# Altium PCB GOCARTPCB.PcbDoc
Units mm, origin at the board's own origin, x right, y up, seen from the top; angles counter-clockwise.
Board outline 152.4 x 101.6 mm, 2 copper layers (Top Layer, Bottom Layer); 35 components, 33 nets, 112 pads, 0 vias.
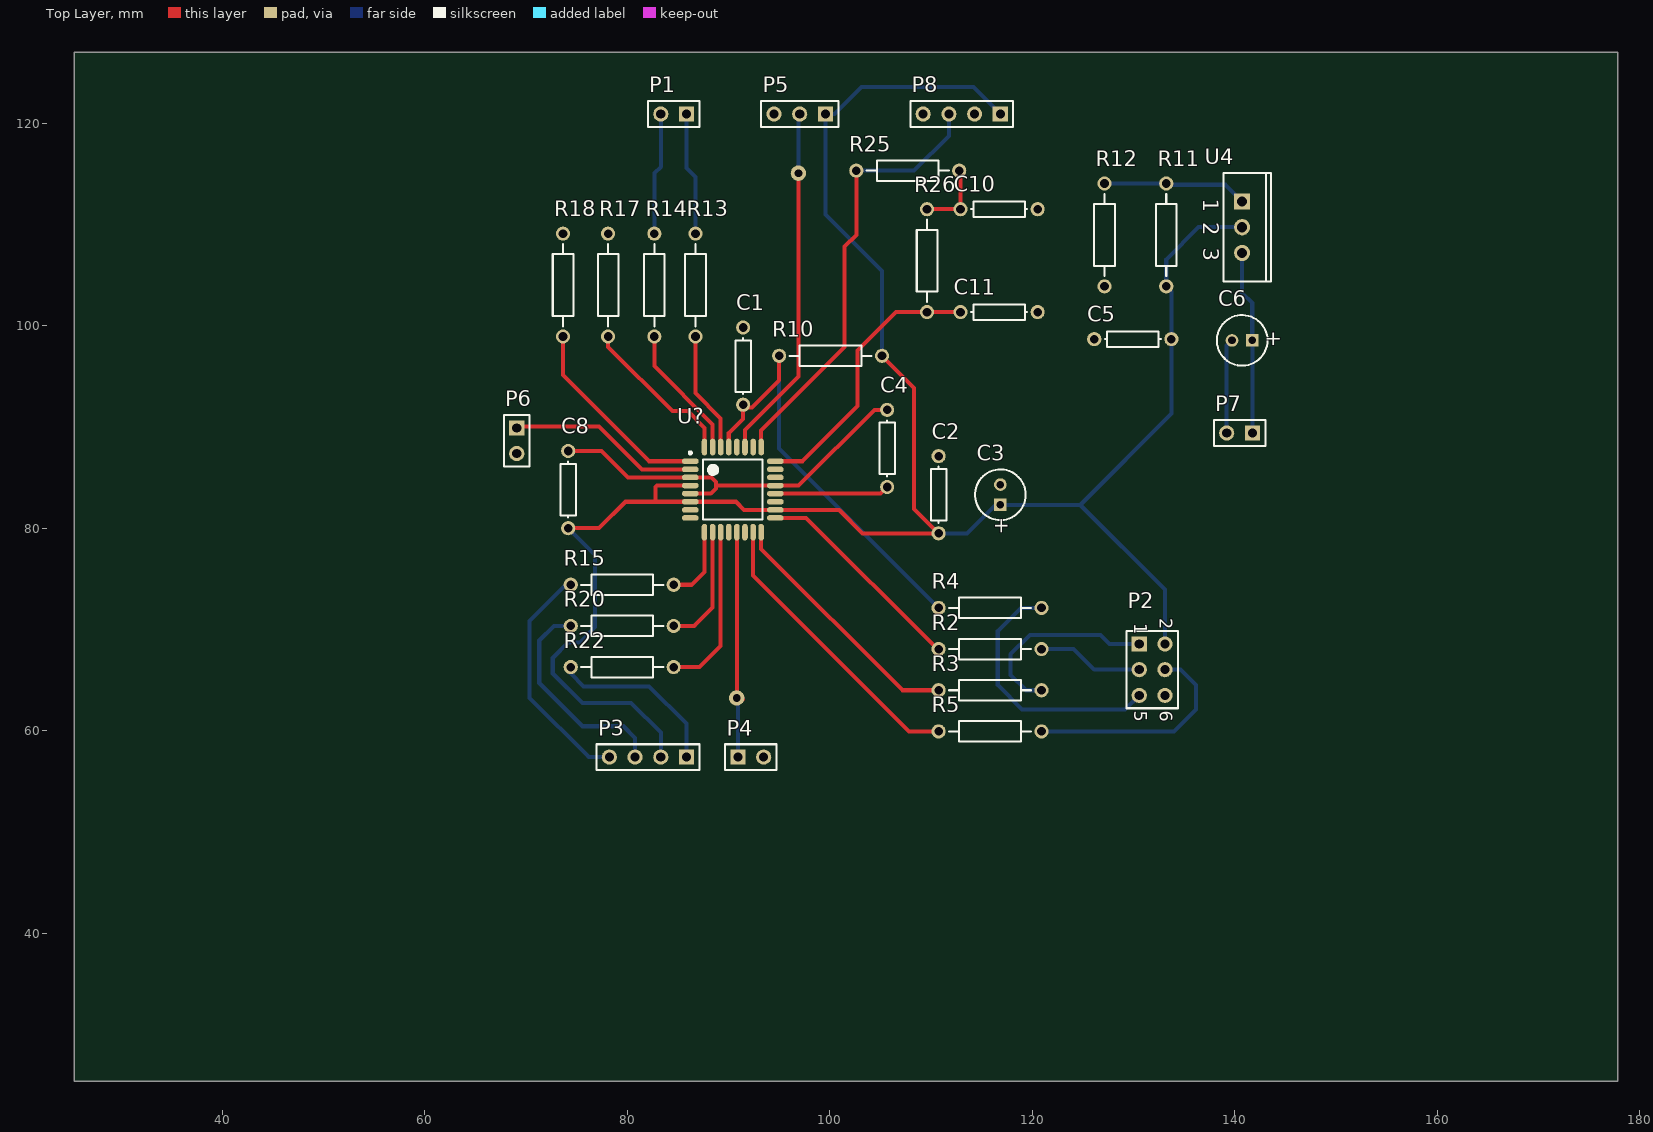
[diagram p0: Top Layer view]
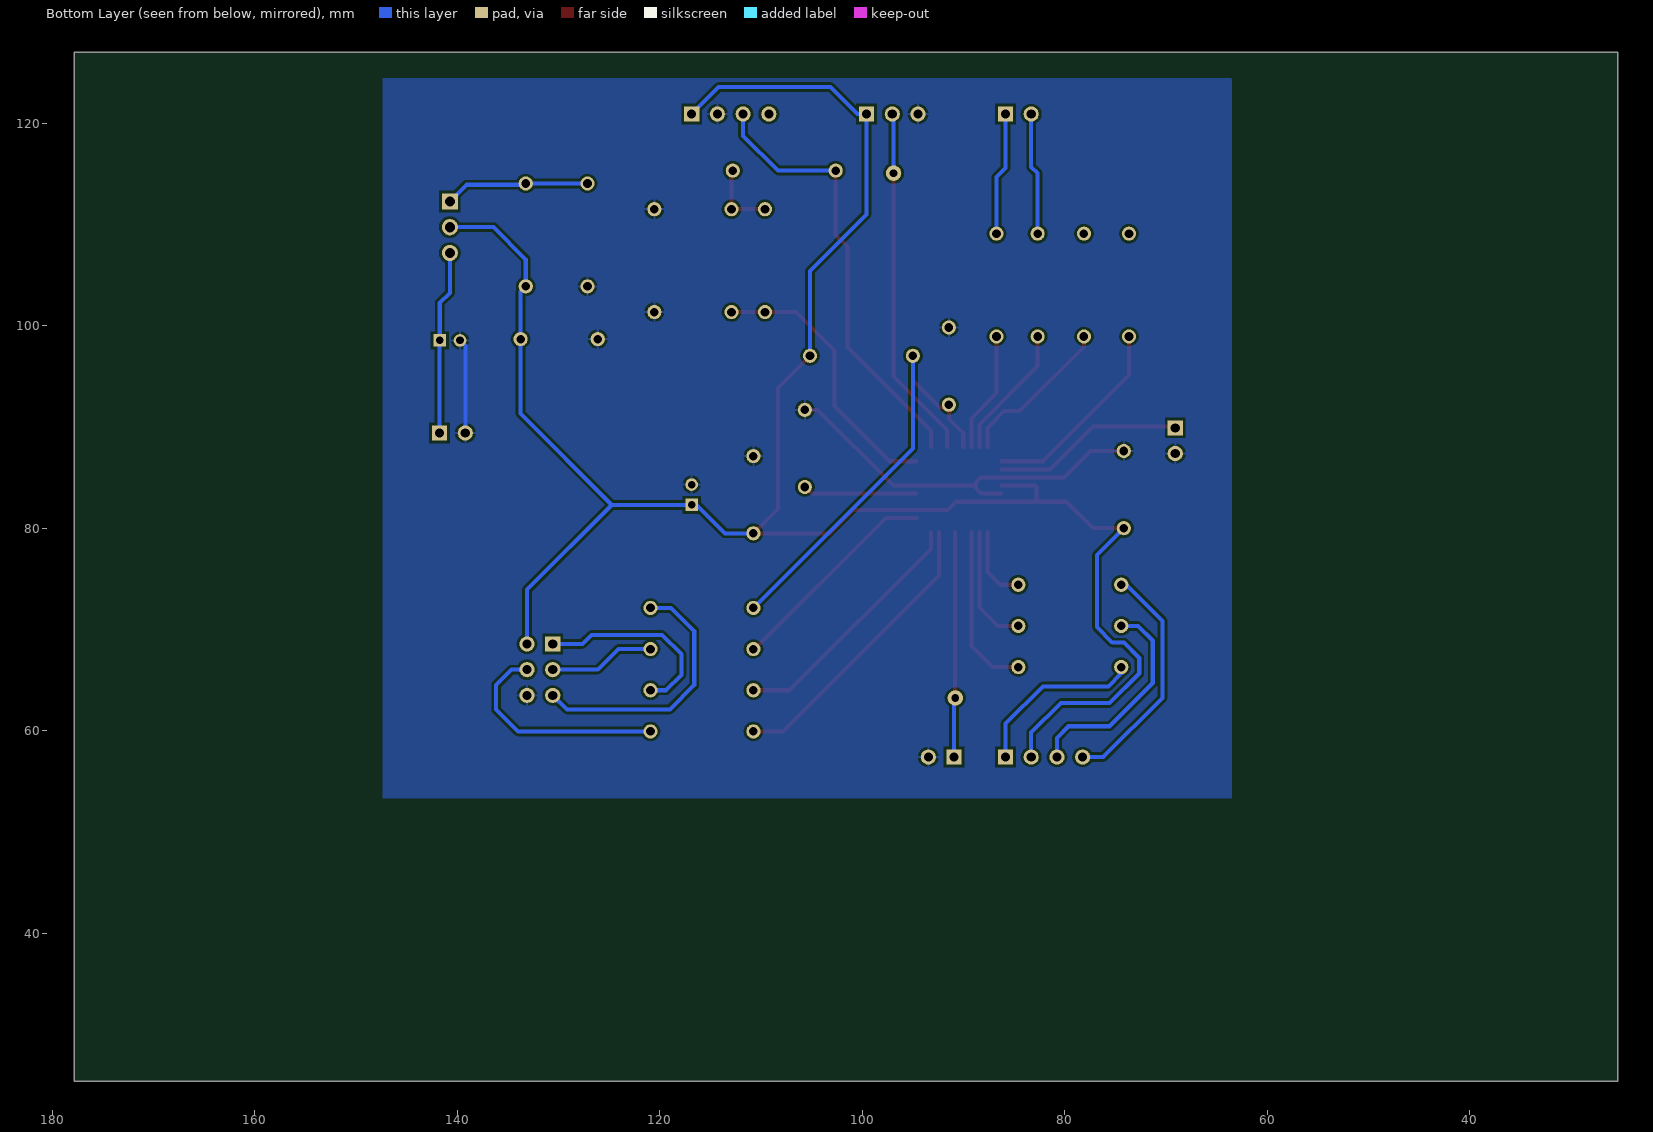
[diagram p1: Bottom Layer view, seen from below]

## Layer stack, top to bottom
Top Layer: signal copper 0.0356
Dielectric: dielectric 0.32, FR-4, Dk 4.8
Bottom Layer: signal copper 0.0356

## Board outline
25.4,25.4 177.8,25.4 177.8,127 25.4,127

## Design rules (kind name [scope] priority, off if disabled: settings)
Clearance [All] p1: gap=0.25
ComponentClearance [All] p1: gap=0.254 collisioncheckmode=3 verticalgap=0.254
PolygonConnect [All] p1: connectstyle=Relief reliefconductorwidth=0.254 reliefentries=4 polygonreliefangle="90 Angle"
RoutingVias [All] p1: holewidth=0.711 width=1.27 viastyle="Through Hole" minholewidth=0.711 minwidth=1.27 maxholewidth=0.711 maxwidth=1.27
SolderMaskExpansion [All] p1: expansion=0.102
TestPointUsage [All] p1: valid=0 allowmultiple=FALSE
Testpoint [All] p1: side=15 testpointundercomponent=TRUE minsize=1.016 maxsize=2.54 preferedsize=1.524 minholesize=0 maxholesize=1.016 preferedholesize=0.813 testpointgrid=0.025 style=1023 order=0123456789
Width [All] p1: maxlimit=1 minlimit=0.4 preferedwidth=0.4
18 further rules are at their usual default settings.

## Components (designator, comment, footprint, x,y, rotation, side; value= is the part's Value field where it differs from the comment)
C1 "" AXIAL-0.3 91.44,96.012 r90 top
C2 "" AXIAL-0.3 110.744,83.312 r90 top
C3 "" B 116.84,83.312 r90 top
C4 "" AXIAL-0.3 105.664,87.884 r270 top
C5 "" AXIAL-0.3 129.921,98.679 r180 top
C6 "" B 140.716,98.552 r180 top
C8 "" AXIAL-0.3 74.168,83.82 r90 top
C10 "" AXIAL-0.3 116.713,111.506 r0 top
C11 "" AXIAL-0.3 116.713,101.346 r0 top
P1 "Header 2" HDR1X2 85.852,120.904 r180 top
P2 "Header 3X2" HDR2X3 130.556,68.58 r270 top
P3 "RGBLED" HDR1X4 85.852,57.404 r180 top
P4 "Header 2" HDR1X2 90.932,57.404 r0 top
P5 "Header 3" HDR1X3 99.568,120.904 r180 top
P6 "Header 2" HDR1X2 69.088,89.916 r270 top
P7 "Header 2" HDR1X2 141.732,89.408 r180 top
P8 "RGBLED" HDR1X4 116.84,120.904 r180 top
R2 "Res3" AXIAL-0.4 115.824,68.072 r0 top
R3 "Res3" AXIAL-0.4 115.824,64.008 r0 top
R4 "Res3" AXIAL-0.4 115.824,72.136 r0 top
R5 "Res3" AXIAL-0.4 115.824,59.944 r180 top
R10 "Res3" AXIAL-0.4 100.076,97.028 r180 top
R11 "Res3" AXIAL-0.4 133.223,108.966 r270 top
R12 "Res3" AXIAL-0.4 127.127,108.966 r90 top
R13 "" AXIAL-0.4 86.741,104.013 r270 top
R14 "" AXIAL-0.4 82.677,104.013 r270 top
R15 "Res3" AXIAL-0.4 79.502,74.422 r180 top
R17 "" AXIAL-0.4 78.105,104.013 r270 top
R18 "" AXIAL-0.4 73.66,104.013 r270 top
R20 "Res3" AXIAL-0.4 79.502,70.358 r180 top
R22 "Res3" AXIAL-0.4 79.502,66.294 r180 top
R25 "Res3" AXIAL-0.4 107.696,115.316 r0 top
R26 "Res3" AXIAL-0.4 109.601,106.426 r270 top
U4 "LM317KC" KC03 140.716,109.728 r270 top
U? "ATmega8-16AC" 32A_N 90.424,83.82 r0 top

## Footprints (in the part's own frame and the unit in brackets; to place one, negate y for a bottom-side part, rotate by r counter-clockwise, add the part's x,y. Pads: shape width x height; smd on the part's side, far side on the other; paste and mask are expansions set on the pad)
32A_N [mm] "Thin QFP, 32-Leads, Body 7x7mm, Pitch 0.8mm, IPC Medium Density"
  oval 1.65x0.55 smd: 1(-4.2,2.8) 2(-4.2,2) 3(-4.2,1.2) 4(-4.2,0.4) 5(-4.2,-0.4) 6(-4.2,-1.2) 7(-4.2,-2) 8(-4.2,-2.8) 17(4.2,-2.8) 18(4.2,-2) 19(4.2,-1.2) 20(4.2,-0.4) 21(4.2,0.4) 22(4.2,1.2) 23(4.2,2) 24(4.2,2.8)
  oval 0.55x1.65 smd: 9(-2.8,-4.2) 10(-2,-4.2) 11(-1.2,-4.2) 12(-0.4,-4.2) 13(0.4,-4.2) 14(1.2,-4.2) 15(2,-4.2) 16(2.8,-4.2) 25(2.8,4.2) 26(2,4.2) 27(1.2,4.2) 28(0.4,4.2) 29(-0.4,4.2) 30(-1.2,4.2) 31(-2,4.2) 32(-2.8,4.2)
  silkscreen extent -4.32,-2.95 2.95,3.75, body extent -3.5,-3.5 3.5,3.5, height 1.2
AXIAL-0.3 [mm] "Resistor; 2 Leads"
  round 1.4 hole 0.85: 1(-3.81,0) 2(3.81,0)
  silkscreen extent -2.77,-0.76 2.77,0.76
AXIAL-0.4 [mm] "Resistor; 2 Leads"
  round 1.4 hole 0.85: 1(-5.08,0) 2(5.08,0)
  silkscreen extent -4.06,-1.02 4.06,1.02
B [mm] "Capacitor, Electrolytic, Radial; Body 5 x 6.8 mm (Dia.xH typ); Pin Spacing 2 mm (typ)"
  rect 1.25x1.25 hole 0.75: 1(-1,0)
  round 1.25 hole 0.75: 2(1,0)
  silkscreen extent -2.5,-2.5 2.5,2.5
HDR1X2 [mm] "Connector; Header; 2 Position"
  rect 1.5x1.5 hole 0.9: 1(0,0)
  round 1.5 hole 0.9: 2(2.54,0)
  silkscreen extent -1.27,-1.27 3.81,1.27
HDR1X3 [mm] "Connector; Header; 3 Position"
  rect 1.5x1.5 hole 0.9: 1(0,0)
  round 1.5 hole 0.9: 2(2.54,0) 3(5.08,0)
  silkscreen extent -1.27,-1.27 6.35,1.27
HDR1X4 [mm] "Connector; Header; 4 Position"
  rect 1.5x1.5 hole 0.9: 1(0,0)
  round 1.5 hole 0.9: 2(2.54,0) 3(5.08,0) 4(7.62,0)
  silkscreen extent -1.27,-1.27 8.89,1.27
HDR2X3 [mm] "Connector; Header; 3x2 Position"
  rect 1.5x1.5 hole 0.9: 1(0,0)
  round 1.5 hole 0.9: 2(0,2.54) 3(2.54,0) 4(2.54,2.54) 5(5.08,0) 6(5.08,2.54)
  silkscreen extent -1.27,-1.27 6.35,3.81
KC03 [mm] "TO, Thru-Hole, Vertical, Heatsink Mounted; 3 In-Line Leads; Pitch 2.54 mm"
  rect 1.6x1.6 hole 1: 1(-2.54,0)
  round 1.6 hole 1: 2(0,0) 3(2.54,0)
  silkscreen extent -5.35,-1.85 5.35,2.85

## Part data
C1 C2 C4 C5 C8 C10 C11: library part Cap, "Capacitor"
C3 C6: library part "Cap Pol1", "Polarized Capacitor (Radial)"
P1 P4 P6 P7: "Header, 2-Pin"
P2: "Header, 3-Pin, Dual row"
P3 P8: library part "Header 4", "Header, 4-Pin"
P5: "Header, 3-Pin"
R2 R3 R4 R5 R10 R11 R12 R15 R20 R22 R25 R26: "Resistor"
R13 R14 R17 R18: library part Res3, "Resistor"
U4: "3-Terminal Adjustable Regulator"
U?: "8-Bit AVR Microcontroller with 8K Bytes of In-System Programmable Flash Memory"

## Free pads (board coordinates)
  round 1.524 hole 0.762: 1(90.805,63.246) 2(96.901,115.062)

## Nets (pads, with @x,y where several pads share a name; then routed paths per layer and width w, separated by ;. In a path a pad name is that pad's centre, name@x,y a point inside that pad or via, vN(x,y) a via of type N, cw(c..) or ccw(c..) an arc to the next point about the centre after c; other vN are vias at no path point)
"ACCEL INPUT": P5.2 pad.2 U?.27 | length 34.9
  Top Layer w0.4: U?.27 91.624,89.719 96.901,94.996 pad.2
  Bottom Layer w0.4: pad.2 P5.2@96.901,120.777
BRAKE: R17.1
"CURRENT SENSE": C11.1 R26.2 U?.24 | length 27.6
  Top Layer w0.4: U?.24 97.288,86.62 102.743,92.075 102.743,97.536 106.553,101.346 C11.1
GND: C1.2 C2.2 C3.2 C4.1 C5.2 C6.2 C8.2 C10.2 C11.2 P2.6 P4.2 P5.3 P6.2 P7.2 P8.2 R12.1 U?.3 U?.5 U?.21 | length 48.5
  Top Layer w0.4: C8.2 77.47,87.63 80.08,85.02 U?.3@86.174,85.02 ; U?.5 88.246,83.42 88.773,83.947 88.773,84.582 88.335,85.02 U?.3 ; 88.792,84.22 96.92,84.22 104.394,91.694 C4.1
  Bottom Layer w0.4: P7.2 139.192,98.028 C6.2
MISO: R3.1 U?.16 | length 24.9
  Top Layer w0.4: U?.16@93.224,79.57 93.224,77.972 107.188,64.008 R3.1
MOSI: R5.2 U?.15 | length 29
  Top Layer w0.4: U?.15 92.424,75.343 107.823,59.944 R5.2
NetC4_2: C4.2 U?.20 | length 11.3
  Top Layer w0.4: U?.20 105.01,83.42 C4.2
NetC10_1: C10.1 R25.2 R26.1 | length 7.2
  Top Layer w0.4: R26.1 C10.1 112.903,115.189 R25.2
NetP2_1: P2.1 R3.2 | length 19.6
  Bottom Layer w0.4: R3.2 119.38,64.008 117.856,65.532 117.856,67.564 119.761,69.469 126.746,69.469 127.635,68.58 P2.1
NetP2_3: P2.3 R2.2 | length 10.5
  Bottom Layer w0.4: R2.2 124.079,68.072 126.111,66.04 P2.3
NetP2_4: P2.4 R5.1 | length 22.2
  Bottom Layer w0.4: R5.1 133.985,59.944 136.144,62.103 136.144,64.516 134.62,66.04 P2.4
NetP2_5: P2.5 R4.2 | length 26.1
  Bottom Layer w0.4: R4.2 118.872,72.136 116.586,69.85 116.586,64.516 118.999,62.103 129.159,62.103 P2.5
NetP3_1: P3.1 R22.2 | length 17.4
  Bottom Layer w0.4: R22.2 74.422,65.659 75.692,64.389 82.169,64.389 85.852,60.706 P3.1
NetP3_3: P3.3 R20.2 | length 21.5
  Bottom Layer w0.4: R20.2 72.771,70.358 71.31,68.897 71.31,64.706 75.565,60.452 79.629,60.452 80.772,59.309 P3.3
NetP3_4: P3.4 R15.2 | length 23.5
  Bottom Layer w0.4: R15.2 73.914,74.422 70.358,70.866 70.358,63.246 76.2,57.404 P3.4
NetR11_1: R11.1 R12.2 U4.1 | length 14.3
  Bottom Layer w0.4: R12.2 R11.1 133.35,113.919 139.065,113.919 U4.1
NetR13_2: R13.2 U?.30 | length 11.9
  Top Layer w0.4: R13.2 86.741,93.345 89.224,90.862 U?.30
NetR14_2: R14.2 U?.31 | length 13.3
  Top Layer w0.4: R14.2 82.677,96.012 88.424,90.265 U?.31
NetR15_1: R15.1 U?.9 | length 7.5
  Top Layer w0.4: R15.1 86.36,74.422 87.624,75.686 U?.9
NetR17_2: R17.2 U?.32 | length 15.7
  Top Layer w0.4: R17.2 78.105,97.917 84.455,91.567 85.979,91.567 87.624,89.922 U?.32
NetR18_2: R18.2 U?.1 | length 19.9
  Top Layer w0.4: R18.2 73.66,95.123 82.163,86.62 U?.1
NetR20_1: R20.1 U?.10 | length 12
  Top Layer w0.4: R20.1 86.614,70.358 88.424,72.168 U?.10
NetR22_1: R22.1 U?.11 | length 16.7
  Top Layer w0.4: R22.1 87.122,66.294 89.224,68.396 U?.11
PWM: P4.1 pad.1 U?.13 | length 22.5
  Top Layer w0.4: U?.13 90.824,63.735 pad.1@91.44,63.119
  Bottom Layer w0.4: P4.1 pad.1@90.932,63.119
RAW: P8.3 R25.1 U?.25 | length 43.9
  Top Layer w0.4: U?.25 93.224,89.668 101.473,97.917 101.473,107.823 102.616,108.966 R25.1
  Bottom Layer w0.4: R25.1 108.331,115.316 111.76,118.745 P8.3
RESET: C1.1 R4.1 R10.2 U?.29 | length 43.4
  Top Layer w0.4: U?.29 90.024,89.389 91.44,90.805 C1.1 91.694,91.948 92.329,91.948 94.996,94.615 R10.2
  Bottom Layer w0.4: R10.2 94.996,87.884 R4.1
RX: P1.1 R13.1 | length 12.2
  Bottom Layer w0.4: P1.1 85.852,115.57 86.741,114.681 R13.1
SCK: R2.1 U?.17 | length 21.5
  Top Layer w0.4: U?.17 97.669,81.02 110.617,68.072 R2.1
SD: P6.1 U?.2 | length 18.9
  Top Layer w0.4: P6.1@69.088,90.043 77.216,90.043 81.439,85.82 U?.2
STOP: R18.1
TX: P1.2 R14.1 | length 12.1
  Bottom Layer w0.4: R14.1 82.677,115.062 83.312,115.697 P1.2
V24: C6.1 P7.1 U4.3 | length 18.2
  Bottom Layer w0.4: U4.3 140.716,103.251 141.716,102.251 C6.1 ; P7.1 C6.1@141.732,98.536
VCC: C2.1 C3.1 C5.1 C8.1 P2.2 P3.2 P5.1 P8.1 R10.1 R11.2 U4.2 U?.4 U?.6 U?.18 | length 212.4
  Top Layer w0.4: C8.1 77.216,80.01 79.826,82.62 U?.6@86.174,82.62 ; 82.804,82.62 82.804,84.074 82.95,84.22 U?.4 ; U?.6 90.735,82.62 91.535,81.82 100.933,81.82 103.251,79.502 C2.1 108.331,81.915 108.331,93.853 R10.1
  Bottom Layer w0.4: C8.1@73.914,79.756 C8.1 76.835,77.343 76.835,70.231 75.311,68.707 74.168,68.707 72.644,67.183 72.644,65.659 75.565,62.738 80.391,62.738 83.312,59.817 P3.2 ; R10.1 105.156,105.41 99.568,110.998 P5.1 100.457,120.904 103.124,123.571 114.173,123.571 P8.1 ; C2.1 113.538,79.502 116.348,82.312 124.73,82.312 ; P2.2 133.096,73.946 124.73,82.312 ; U4.2 136.398,109.728 133.223,106.553 R11.2 133.731,103.378 133.731,91.313 124.73,82.312
pads on no net: P8.4 U?.7 U?.8 U?.12 U?.14 U?.19 U?.22 U?.23 U?.26 U?.28

## Polygon pours and split planes (outlines as drawn)
GND on Bottom Layer "Bottom Layer-No Net" (solid): 63.373,124.46 147.32,124.46 147.32,53.34 63.5,53.34 63.5,124.333 63.373,124.46

## Text inside footprints (layer, text, board x,y; h text height)
C3: Top Overlay "+" at 117.59,79.337 h1.5 r90
C6: Top Overlay "+" at 144.691,99.302 h1.5 r180
P2: Top Overlay "6" at 132.588,61.976 h1.27 r270; Top Overlay "5" at 130.048,61.976 h1.27 r270; Top Overlay "2" at 132.588,71.12 h1.27 r270; Top Overlay "1" at 130.048,70.612 h1.27 r270
U4: Top Overlay "2" at 136.891,110.228 h1.5 r270; Top Overlay "1" at 136.891,112.518 h1.5 r270; Top Overlay "3" at 136.891,107.688 h1.5 r270